# Altium PCB PCB2.PcbDoc
Units mm, origin at the board's own origin, x right, y up, seen from the top; angles counter-clockwise.
Board outline 226.31 x 158.75 mm, 2 copper layers (Top Layer, Bottom Layer); 50 components, 70 nets, 346 pads, 78 vias.
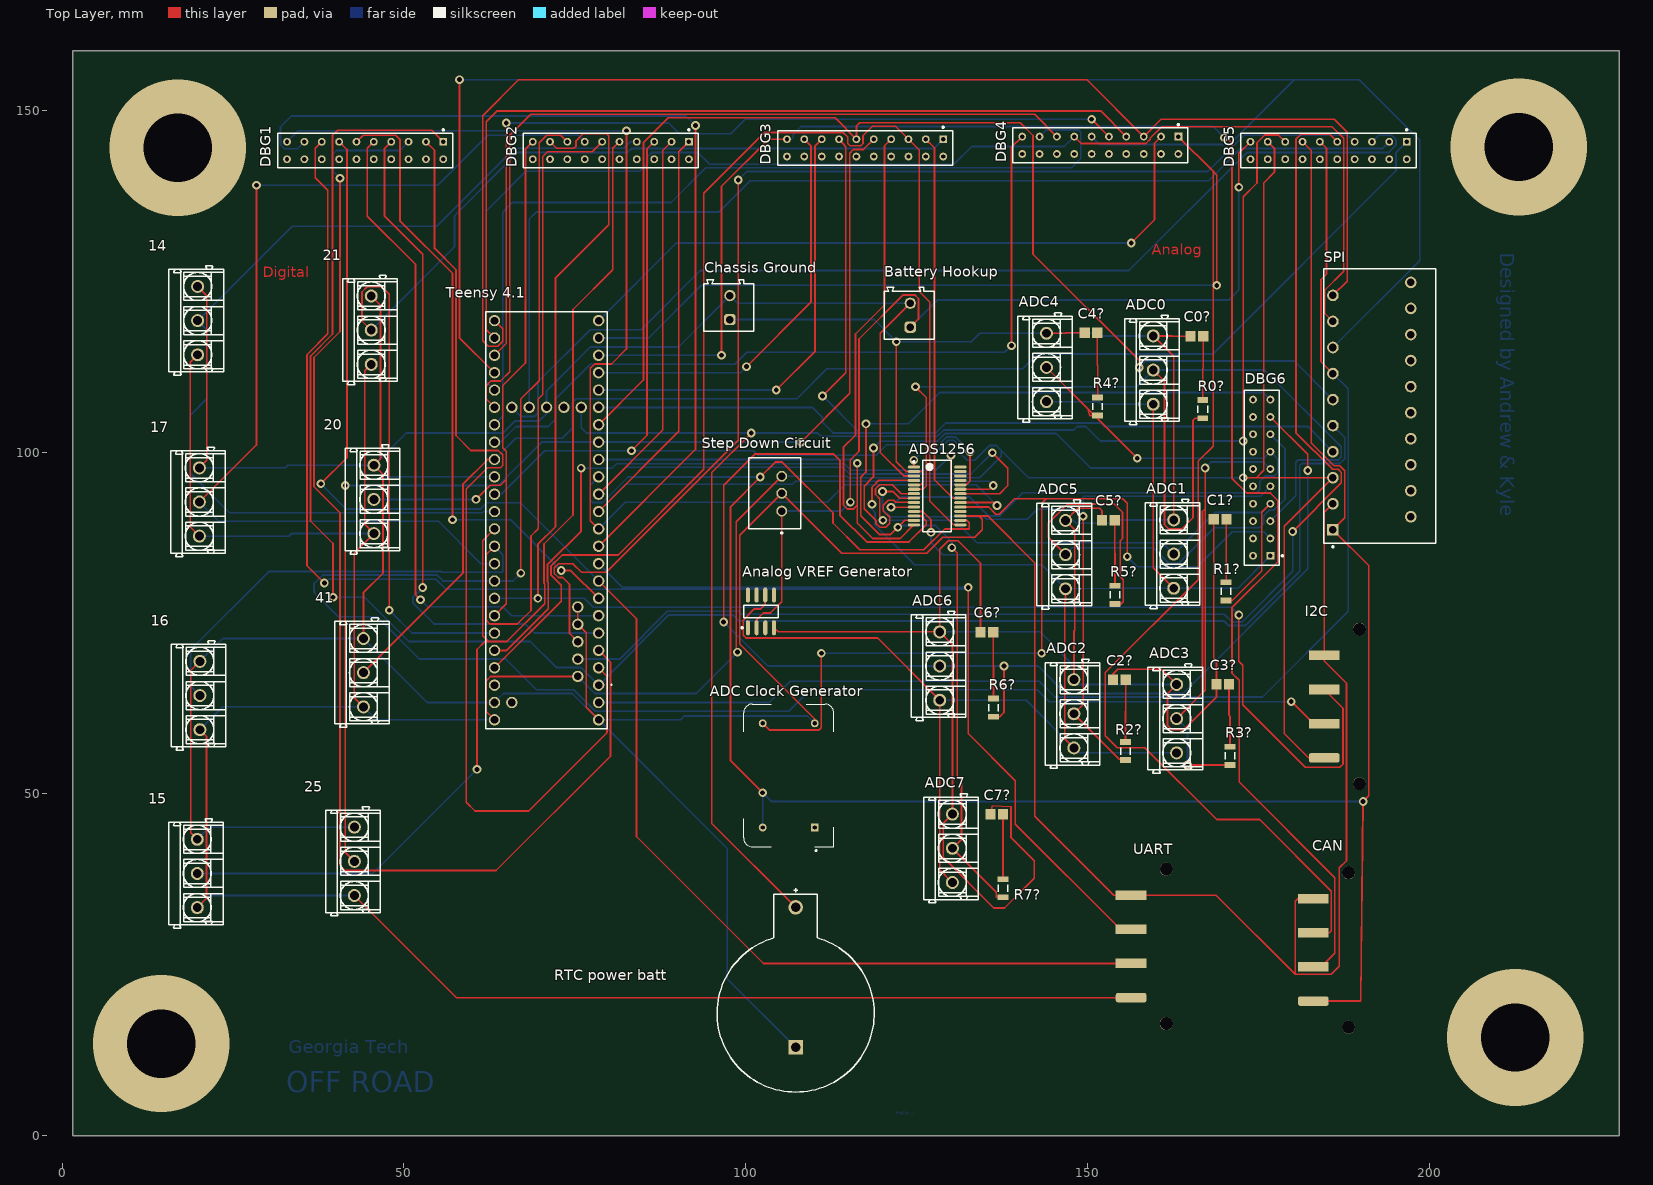
[diagram p0: Top Layer view]
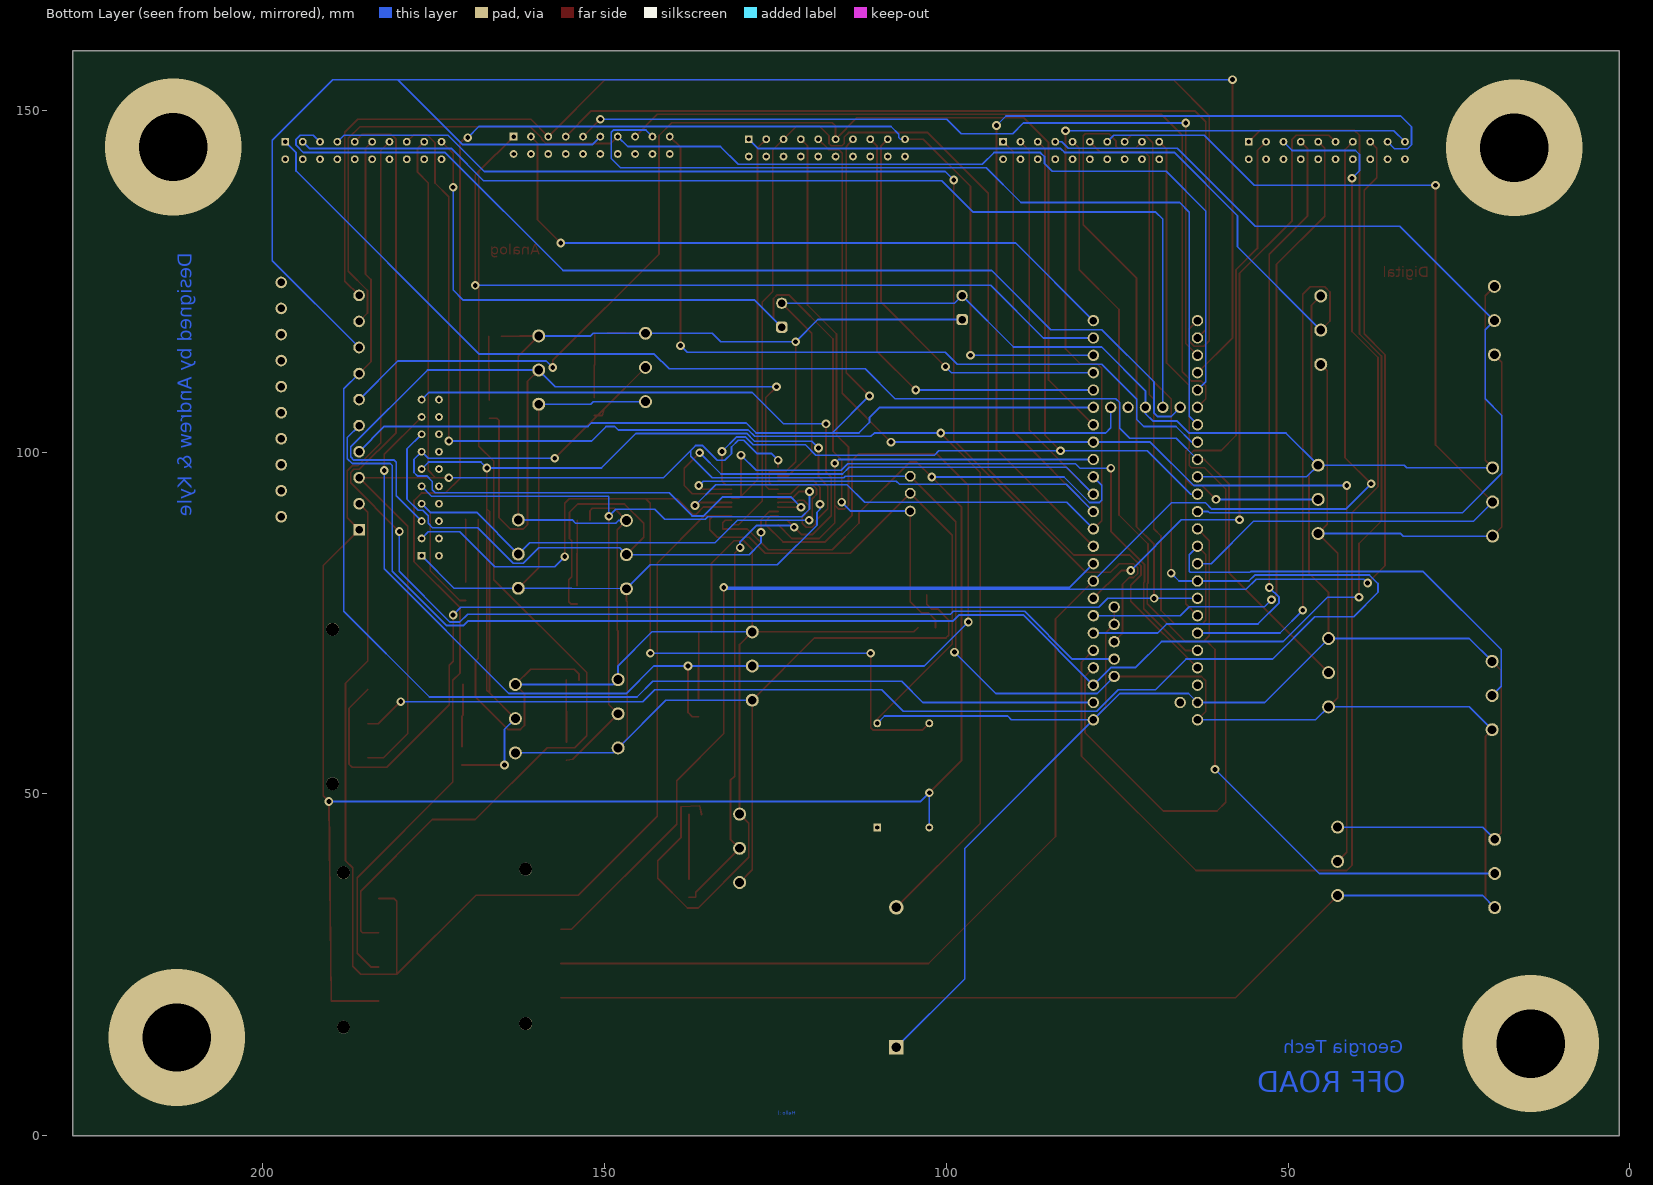
[diagram p1: Bottom Layer view, seen from below]
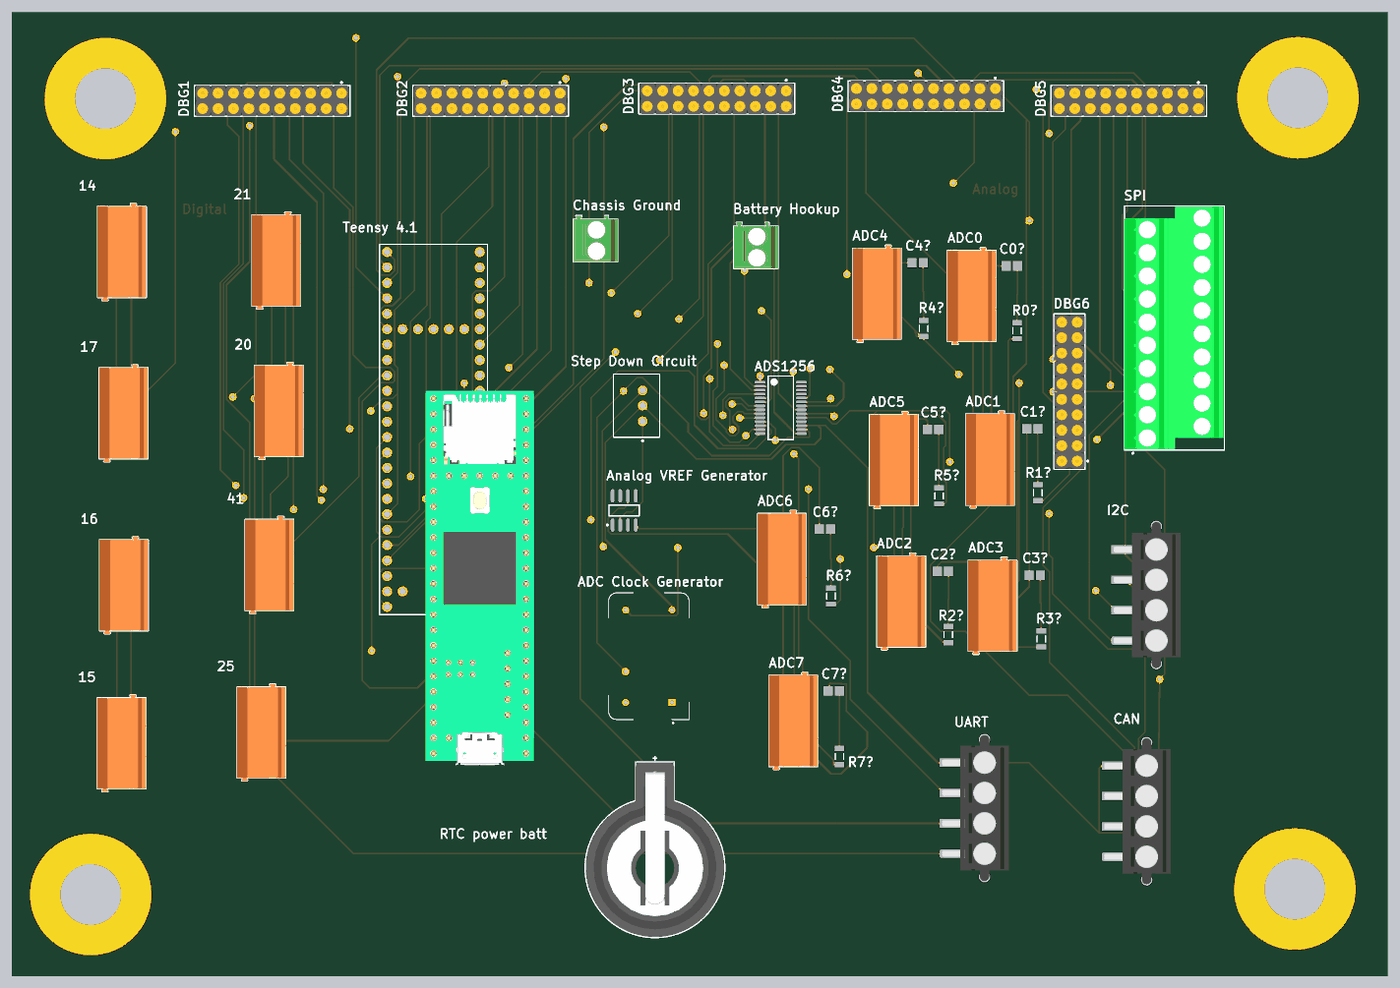
[diagram p2: 3D render of the assembled board from above, using the file's embedded part models]

## Layer stack, top to bottom
Top Solder: solder mask 0.0102, Solder Resist, Dk 3.5
Top Layer: signal copper 0.0356
Dielectric 1: dielectric 0.32, FR-4, Dk 4.8
Bottom Layer: signal copper 0.0356
Bottom Solder: solder mask 0.0102, Solder Resist, Dk 3.5

## Board outline
1.524,0 227.838,0 227.838,158.75 1.524,158.75

## Design rules (kind name [scope] priority, off if disabled: settings)
Clearance [All] p1: gap=0.254 ignorepadtopadclearanceinfootprint=FALSE
PolygonConnect [All] p1: connectstyle=Relief reliefconductorwidth=0.254 reliefentries=4 polygonreliefangle="90 Angle" airgapwidth=0.254
RoutingVias [All] p1: holewidth=0.711 width=1.27 viastyle="Through Hole" minholewidth=0.711 minwidth=1.27 maxholewidth=0.711 maxwidth=1.27
SolderMaskExpansion [All] p1: expansion=0.102 istentingtop=FALSE
SupplyNets "Schematic Supply Nets" [InNet('GND')] p1: voltage=0.000
Width [All] p1: maxlimit=0.254 minlimit=0.254 preferedwidth=0.254
30 further rules are at their usual default settings.

## Classes and differential pairs
component class Sheet1: C0? C1? C2? C3? C4? C5? C6? C7? R0? R1? R2? R3? R4? R5? R6? R7?
component class DebugOutputs: DBG1 DBG2 DBG3 DBG4 DBG5 DBG6
component class MainSchematic: 14 15 16 17 20 21 25 41 ADC0 ADC1 ADC2 ADC3 ADC4 ADC5 ADC6 ADC7 "ADC Clock Generator" ADS1256 "Analog VREF Generator" "Battery Hookup" CAN "Chassis Ground" I2C "RTC power batt" SPI "Step Down Circuit" "Teensy 4.1" UART

## Components (designator, comment, footprint, x,y, rotation, side; value= is the part's Value field where it differs from the comment)
14 "1791620000" PM_5_00_90_03 19.612,119.253 r90 top
15 "1791620000" PM_5_00_90_03 19.558,38.354 r90 top
16 "1791620000" PM_5_00_90_03 19.939,64.389 r90 top
17 "1791620000" PM_5_00_90_03 19.866,92.71 r90 top
20 "1791620000" PM_5_00_90_03 45.393,93.091 r90 top
21 "1791620000" PM_5_00_90_03 45.012,117.856 r90 top
25 "1791620000" PM_5_00_90_03 42.545,40.132 r90 top
41 "1791620000" PM_5_00_90_03 43.869,67.738 r90 top
ADC0 "1791620000" PM_5_00_90_03 159.439,112.014 r90 top
ADC1 "1791620000" PM_5_00_90_03 162.433,85.09 r90 top
ADC2 "1791620000" PM_5_00_90_03 147.828,61.722 r90 top
ADC3 "1791620000" PM_5_00_90_03 162.868,61.007 r90 top
ADC4 "1791620000" PM_5_00_90_03 143.818,112.395 r90 top
ADC5 "1791620000" PM_5_00_90_03 146.612,85.01 r90 top
ADC6 "1791620000" PM_5_00_90_03 128.197,68.707 r90 top
ADC7 "1791620000" PM_5_00_90_03 130.048,42.037 r90 top
"ADC Clock Generator" "MCO-1510A" OSC_ECS-100AX-500 106.299,52.705 r90 top
ADS1256 "ADS1256IDBTG4" TI-DB28_L 128.016,93.599 r0 top
"Analog VREF Generator" "ADR4550ARZ" ADI-R-8_N 102.235,76.708 r90 top
"Battery Hookup" "691214110002S" 691214110002S 123.929,120.043 r90 top
C0? "VJ0805Y682KXAMT" CAPC2013X145X48ML20T23 166.025,116.967 r0 top
C1? "VJ0805Y682KXAMT" CAPC2013X145X48ML20T23 169.418,90.17 r0 top
C2? "VJ0805Y682KXAMT" CAPC2013X145X48ML20T23 154.686,66.675 r0 top
C3? "VJ0805Y682KXAMT" CAPC2013X145X48ML20T23 169.805,66.032 r0 top
C4? "VJ0805Y682KXAMT" CAPC2013X145X48ML20T23 150.531,117.475 r0 top
C5? "VJ0805Y682KXAMT" CAPC2013X145X48ML20T23 153.071,90.043 r0 top
C6? "VJ0805Y682KXAMT" CAPC2013X145X48ML20T23 135.291,73.66 r0 top
C7? "VJ0805Y682KXAMT" CAPC2013X145X48ML20T23 136.743,46.99 r0 top
CAN "691709710304" 691709710304 188.214,27.178 r90 top
"Chassis Ground" "691214110002S" 691214110002S 97.536,121.158 r90 top
DBG1 "TD-110-G-AA" FP-TD-110-G-AA-MFG 44.323,144.145 r180 top
DBG2 "TD-110-G-AA" FP-TD-110-G-AA-MFG 80.264,144.145 r180 top
DBG3 "TD-110-G-AA" FP-TD-110-G-AA-MFG 117.475,144.526 r180 top
DBG4 "TD-110-G-AA" FP-TD-110-G-AA-MFG 151.892,144.907 r180 top
DBG5 "TD-110-G-AA" FP-TD-110-G-AA-MFG 185.293,144.145 r180 top
DBG6 "TD-110-G-AA" FP-TD-110-G-AA-MFG 175.514,96.266 r90 top
I2C "691709710304" 691709710304 189.808,62.778 r90 top
R0? "RC1206FR-10750RL" RESC3116X65X40LL10T20 166.878,106.299 r90 top
R1? "RC1206FR-10750RL" RESC3116X65X40LL10T20 170.307,79.629 r90 top
R2? "RC1206FR-10750RL" RESC3116X65X40LL10T20 155.575,56.261 r90 top
R3? "RC1206FR-10750RL" RESC3116X65X40LL10T20 170.881,55.56 r90 top
R4? "RC1206FR-10750RL" RESC3116X65X40LL10T20 151.511,106.68 r90 top
R5? "RC1206FR-10750RL" RESC3116X65X40LL10T20 154.051,79.121 r90 top
R6? "RC1206FR-10750RL" RESC3116X65X40LL10T20 136.271,62.611 r90 top
R7? "RC1206FR-10750RL" RESC3116X65X40LL10T20 137.668,36.195 r90 top
"RTC power batt" "101" FP-101-MFG 107.315,20.828 r90 top
SPI "1708110" FP-1708110-MFG 192.778,106.746 r90 top
"Step Down Circuit" "OKI-78SR-5/1.5-W36-C" MURA-OKI-78SR-3 105.283,93.98 r90 top
"Teensy 4.1" "TEENSY_4.1" TEENSY41 78.486,65.913 r90 top
UART "691709710304" 691709710304 161.544,27.686 r90 top

## Footprints (in the part's own frame and the unit in brackets; to place one, negate y for a bottom-side part, rotate by r counter-clockwise, add the part's x,y. Pads: shape width x height; smd on the part's side, far side on the other; paste and mask are expansions set on the pad)
691214110002S [mm] "Serie 2141S - 3.50 mm _ 2 pins"
  rrect50% 1.65x1.65 hole 1.1: 1(-1.75,-0.15)
  round 1.65 hole 1.1: 2(1.75,-0.15)
  silkscreen extent -3.5,-3.65 4.1,3.65, body extent -3.5,-3.65 4.1,3.65, height 9.15
691709710304 [mm] "Horizontal Entry SMT with Pressure Clamp, pitch 5mm, 04p"
  rrect50% 1.4x4.5 smd: 1(-7.5,5.15)
  rect 1.4x4.5 smd: 2(-2.5,5.15) 3(2.5,5.15) 4(7.5,5.15)
  round 1.9 hole 1.9 unplated: M1(-11.3,0) M2(11.3,0)
  body extent -12,-4 12,7, height 9.95
ADI-R-8_N [mm] "SOIC, 8-Leads, Body 4.9x3.9mm, Pitch 1.27mm, IPC Medium Density"
  oval 2.2x0.6 smd: 1(-2.4,1.905) 2(-2.4,0.635) 3(-2.4,-0.635) 4(-2.4,-1.905) 5(2.4,-1.905) 6(2.4,-0.635) 7(2.4,0.635) 8(2.4,1.905)
  silkscreen extent -2.52,-2.5 0.9,2.88, body extent -2,-2.5 2,2.5, height 1.75
CAPC2013X145X48ML20T23 [mm] "Chip Capacitor, 2-Leads, Body 2.00x1.25mm, IPC Low Density"
  rect 1.5x1.55 smd: 1(-0.925,0) 2(0.925,0)
  body extent -1.1,-0.72 1.1,0.72, height 1.45
FP-101-MFG [mm]
  rect 2.145x2.145 hole 1.395 paste-2539.97 mask+0: 1(-7.925,0)
  round 2.145 hole 1.395 paste-2539.97 mask+0: 2(12.565,0)
  silkscreen extent -14.46,-11.5 15.38,11.5, body extent -14.57,-11.61 14.57,11.61, height 0.25
FP-1708110-MFG [mm]
  rect 1.7x1.7 hole 1.1 paste-2539.97 mask+0: 1(-18.1,6.85)
  round 1.7 hole 1.1 paste-2539.97 mask+0: 2(-14.29,6.85) 3(-10.48,6.85) 4(-6.67,6.85) 5(-2.86,6.85) 6(0.95,6.85) 7(4.76,6.85) 8(8.57,6.85) 9(12.38,6.85) 10(16.19,6.85) 11(-16.2,-4.55) 12(-12.39,-4.55) 13(-8.58,-4.55) 14(-4.77,-4.55) 15(-0.96,-4.55) 16(2.85,-4.55) 17(6.66,-4.55) 18(10.47,-4.55) 19(14.28,-4.55) 20(18.09,-4.55)
  silkscreen extent -20.72,-8.23 20.1,8.23, body extent -20.2,-8.32 20.2,8.32, height 0.25
FP-TD-110-G-AA-MFG [mm]
  rect 1.135x1.135 hole 0.635 paste-2539.97 mask+0: 1(-11.43,-1.27)
  round 1.135 hole 0.635 paste-2539.97 mask+0: 2(-11.43,1.27) 3(-8.89,-1.27) 4(-8.89,1.27) 5(-6.35,-1.27) 6(-6.35,1.27) 7(-3.81,-1.27) 8(-3.81,1.27) 9(-1.27,-1.27) 10(-1.27,1.27) 11(1.27,-1.27) 12(1.27,1.27) 13(3.81,-1.27) 14(3.81,1.27) 15(6.35,-1.27) 16(6.35,1.27) 17(8.89,-1.27) 18(8.89,1.27) 19(11.43,-1.27) 20(11.43,1.27)
  silkscreen extent -12.81,-3.14 12.81,2.54, body extent -12.91,-2.64 12.91,2.64, height 0.25
MURA-OKI-78SR-3 [mm] "THMT, 3-Leads, Body 10.4x7.6mm"
  round 1.6 hole 1.1: 1(-2.6,0) 2(0,0) 3(2.5,0)
  silkscreen extent -5.92,-2.8 5.2,4.8, body extent -5.2,-2.8 5.2,4.8, height 16.5
OSC_ECS-100AX-500 [mm]
  rect 1.158x1.158 hole 0.65: 1(-7.62,-3.81)
  round 1.158 hole 0.65: 7(7.62,-3.81) 8(7.62,3.81) 14(-7.62,3.81)
  silkscreen extent -11.1,-6.6 10.43,6.6
PM_5_00_90_03 [mm] "PM 5.00/03/90 3.5"
  round 1.9 hole 1.3: A1(-5,-0.2) A2(0,-0.2) A3(5,-0.2)
  silkscreen extent -8,-4 8,4, body extent -8,-4 8,4, height 10.01
RESC3116X65X40LL10T20 [mm] "Chip Resistor, 2-Leads, Body 3.10x1.60mm, IPC High Density"
  rect 0.85x1.6 smd: 1(-1.325,0) 2(1.325,0)
  silkscreen extent -0.5,-0.7 0.5,0.7, body extent -1.6,-0.85 1.6,0.85, height 0.65
TEENSY41 [mm]
  round 1.665 hole 1.11: 1(0,0) 2(2.54,0) 3(5.08,0) 4(7.62,0) 5(10.16,0) 6(12.7,0) 7(15.24,0) 8(17.78,0) 9(20.32,0) 10(22.86,0) 11(25.4,0) 12(27.94,0) 13(27.94,15.24) 14(25.4,15.24) 15(22.86,15.24) 16(20.32,15.24) 17(17.78,15.24) 18(15.24,15.24) 19(12.7,15.24) 20(10.16,15.24) 21(7.62,15.24) 22(5.08,15.24) 23(2.54,15.24) 24(33.02,0) 25(35.56,0) 26(38.1,0) 27(40.64,0) 28(43.18,0) 29(45.72,0) 30(48.26,0) 31(50.8,0) 32(53.34,0) 33(53.34,15.24) 34(50.8,15.24) 35(48.26,15.24) 36(45.72,15.24) 37(43.18,15.24) 38(40.64,15.24) 39(38.1,15.24) 40(35.56,15.24) 41(33.02,15.24) 42(30.48,0) 43(40.64,2.54) 44(40.64,5.08) 45(40.64,7.62) 46(40.64,10.16) 47(40.64,12.7) 48(11.43,3.05) 49(8.89,3.05) 50(6.35,3.05) 51(3.81,3.05) 52(1.27,3.05) 53(0,15.24) 55(-5.08,15.24) 57(-2.54,0) 68(-2.54,12.7) 69(30.48,15.24) 70(-2.54,15.24) 71(-5.08,0)
  silkscreen extent -6.35,-1.95 54.61,16.51, body extent -31.18,-8.89 30.48,8.89, height 7.15
TI-DB28_L [mm] "SOP, 28-Leads, Body 10.2x5.3mm, Pitch 0.65mm, IPC High Density"
  oval 1.8x0.45 smd: 1(-3.4,4.225) 2(-3.4,3.575) 3(-3.4,2.925) 4(-3.4,2.275) 5(-3.4,1.625) 6(-3.4,0.975) 7(-3.4,0.325) 8(-3.4,-0.325) 9(-3.4,-0.975) 10(-3.4,-1.625) 11(-3.4,-2.275) 12(-3.4,-2.925) 13(-3.4,-3.575) 14(-3.4,-4.225) 15(3.4,-4.225) 16(3.4,-3.575) 17(3.4,-2.925) 18(3.4,-2.275) 19(3.4,-1.625) 20(3.4,-0.975) 21(3.4,-0.325) 22(3.4,0.325) 23(3.4,0.975) 24(3.4,1.625) 25(3.4,2.275) 26(3.4,2.925) 27(3.4,3.575) 28(3.4,4.225)
  silkscreen extent -3.52,-5.25 2.1,5.25, body extent -2.8,-5.25 2.8,5.25, height 2

## Part data
14 15 16 17 20 21 25 41 ADC0 ADC1 ADC2 ADC3 ADC4 ADC5 ADC6 ADC7: library part CMP-1559-01624-1, "OMNIMATE Signal - series PM", Colour=Orange, Manufacturer=Weidmueller, Rated_current_use_group_B_UL_1059="15 A", Rated_voltage_for_surge_voltage_class_pollution_degree_II_2="600 V", Rated_voltage_use_group_B_UL_1059="300 V", UL_94_flammability_rating=V-0, ComponentLink1Description="Manufacturer URL", ComponentLink1URL=http://www.weidmueller.com/, ComponentLink2Description="URL Link1", ComponentLink2URL=http://catalog.weidmueller.com/catalog/Start.do?localeId=en&ObjectID=1791620000, Contact_material=Cu-Leg, Contact_surface=tinned, Insulating_material="Wemid (PA)", Mounting_onto_the_PCB="Solder connection", No_of_poles=3, PackageReference=PM_5_00_90_03, Packaging=Box, PartNumber=1791620000, Pitch_inch="0,197 inch", Pitch_mm="5 mm", Qty="500 PCS", Revision=V1, Short_text_for_material="PM 5.00/03/90 3.5SN OR BX", Side_termination_characteristic="closed side", Solder_pin_length_mm="3,5 mm", Solid_max_H05_07_V_U="2,5 mm²", Solid_min_H05_07_V_U="0,13 mm²", Wire_cross_section_AWG_max_UL_1059="AWG 14", Wire_cross_section_AWG_min_UL_1059="AWG 26"
"ADC Clock Generator": library part ECS-100AX-500, "Oscillator  14-DIP, 4 Leads (Full Size, Metal Can)", Package=None, Availability=Unavailable, MP=ECS-100AX-500, Price=None
ADS1256: library part CMP-0003-00153-1, "24-Bit, 30 kSPS Very Low Noise Delta-Sigma ADC with Multiplexer, -40 to 85 degC, 28-pin SOP (DB28), Green (RoHS & no Sb/Br)", Analog Voltage AV/DD(Max)(V)=5.25, Analog Voltage AV/DD(Min)(V)=4.75, Manufacturer="Texas Instruments", # Input Channels=8, Architecture=Delta-Sigma, Code_JEDEC=MO-150, ComponentLink1Description="Manufacturer URL", ComponentLink1URL=http://www.ti.com/, ComponentLink2Description=Datasheet, ComponentLink2URL=http://www.ti.com/general/docs/lit/getliterature.tsp?genericPartNumber=ADS1256&fileType=pdf, ComponentLink3Description="Package Specification", ComponentLink3URL=http://www.ti.com/lit/ml/msso002e/msso002e.pdf, DatasheetVersion=SBAS288J, Digital Supply(Max)(V)=3.6, Digital Supply(Min)(V)=1.8, Eco-Plan="Green (RoHS & no Sb/Br)", Interface="Serial SPI", Mounting Technology="Surface Mount", PackageDescription="28-Pin Plastic Small Outline, Body 10.2 X 5.3 mm, Pitch 0.65 mm", PackageReference=DB28, PackageVersion="4040065/E, 12/2001", PartNumber=ADS1256IDBTG4, Resolution(Bits)=24, Sample Rate (max)(SPS)=30k, SubFamily="Precision ADC (<=10MSPS)"
"Analog VREF Generator": library part CMP-0784-00194-1, "Ultralow Noise, High Accuracy Voltage Reference, 5 V Output, 3 to 15 V Supply, Industrial, 8-pin SOIC (R-8), Tube", Manufacturer="Analog Devices", Operating Temp Range="-40 to 125 degC", Code_JEDEC=MS-012-AA, ComponentLink1Description="Manufacturer URL", ComponentLink1URL=http://www.analog.com/en/index.html, ComponentLink2Description=Datasheet, ComponentLink2URL=http://www.analog.com/static/imported-files/data_sheets/ADR4520_4525_4530_4533_4540_4550.pdf, ComponentLink3Description="Package Specification", ComponentLink3URL=http://www.analog.com/static/imported-files/packages/PKG_PDF/SOIC_Narrow%20(R)/R_8.pdf, ComponentLink4Description="URL Link1", ComponentLink4URL="Product URL:http://www.analog.com/en/special-linear-functions/voltage-references/adr4550/products/product.html", DatasheetVersion="Rev. 0", Max V Supply (V)=15, Min V Supply (V)=3, Mounting Technology="Surface Mount", PackageDescription="8-Pin Standard Small Outline Package, Body 4.9 x 3.9 mm, Pitch 1.27 mm", PackageReference=R-8, PackageVersion="060506-A, 06/2006", Packing=Tube, PartNumber=ADR4550ARZ, Ref Out TC (ppm/C)=4, Vout=5V
"Battery Hookup" "Chassis Ground": library part CMP-1502-02465-2, Current Rating=10A, Max Operating Temperature=120°C, Min Operating Temperature=-30°C, Voltage Rating=300V, Contact Material="Nickel, Tin", Height=9.2mm, Lead Pitch=3.5mm, NexarPartId=94172715, Number of Contacts=2, Number of Pins=2, Number of Rows=1, Packaging=Box
C0? C1? C2? C3? C4? C5? C6? C7?: library part CMP-2007-03205-1, Manufacturer=Vitramon, Part Number=VJ0805Y682KXAMT
CAN I2C UART: library part CMP-1502-03337-2, Color=Black, Current=6A, Flammability Rating="UL94 V-0", Max Operating Temperature=130°C, Min Operating Temperature=-40°C, Voltage=300V, Connector Type=Screw, Contact Material=Nickel, Contact Plating=Tin, Current Rating=6A, Height=10.2mm, Housing Material=Nylon, Lead Pitch=5mm, Length=20mm, Mount="Surface Mount", NexarPartId=34171771, Number of Contacts=4, Number of Levels=1, Number of Pins=4, Number of Positions=4, Number of Positions Per Level=4, Number of Rows=1, Packaging=Digi-Reel®, Pitch=5mm, Plating=Steel, REACH SVHC=Unknown, RoHS=Compliant, Termination=Screw, Voltage Rating=300V, Wire Gauge (Max)=30AWG, Wire Gauge (Min)=30AWG, Wire/Cable Gauge=30AWG
DBG1 DBG2 DBG3 DBG4 DBG5 DBG6: library part CMP-02766-001426-1, ".100\" DOUBLE ROW SCREW MACHINE T", Contact Material=Brass, Contact Plating=Gold, Gender=Male, Mount="Through Hole", Number of Contacts=20, Number of Rows=2, REACH SVHC="No SVHC", series=TD, Termination="Through Hole"
R0? R1? R2? R3? R4? R5? R6? R7?: library part CMP-2003-04964-1, Manufacturer=Yageo, Part Number=RC1206FR-10750RL
"RTC power batt": library part CMP-19636-000018-1, "BATTERY HOLDER COIN 20MM PC PIN", Max Operating Temperature=145°C, Min Operating Temperature=-50°C, Package Quantity=1, Body Material=PBT, Contact Plating=Tin, Lead Free="Lead Free", Material=Steel, Mount="Through Hole", Number of Batteries=1, Number of Cells=1, Packaging=Bag, REACH SVHC="No SVHC", series=-, Termination="PC Pin"
SPI: library part CMP-00298-00058710-1, "1708110 10 Position Wire to Board Terminal Block Horizontal with Board 0.150\" (3.81mm) Through Hole", Ambient Temperature Range High=105°C, Color=Green, Current=10A, Current Rating=8A, Flammability Rating="UL94 V-0", Min Operating Temperature=-40°C, Voltage=300V, Voltage Rating=200V, Approvals="CB, CSA, UL, cULus", Connector Type=Screw, Contact Material=Tin, Depth=16.2mm, Gender=Male, Height=16.2mm, Housing Color=Green, Housing Material=Nylon, Insulation Material=Nylon, Lead Free="Lead Free", Length=38.1mm, Material=Polyamide, Max Current Rating=10A, Max Operating Temperature=105°C, Mount="Through Hole", NexarPartId=58710, Number of Circuits=20, Number of Contacts=10, Number of Levels=2, Number of Pins=20, Number of Poles=10, Number of Positions=10, Number of Positions Per Level=10, Number of Rows=2, Orientation=Straight, Pitch=3.81mm, RoHS=Compliant, Stripping Length=5mm, Termination=Screw, Weight=1.360777kg, Width=16.3mm, Wire Gauge (Max)=30AWG, Wire Gauge (Min)=26AWG
"Step Down Circuit": library part CMP-2000-05274-1, "Non-Isolated DC/DC Converter, 7.5 W, 7 to 36 V, 1.5 A, -40 to 85 degC, 3-Pin THD, RoHS", Current - Output (Max)=1.5A, Manufacturer=Murata, Operating Temperature=-40degC~85degC, Package / Case=3-SIPModule, Power (Watts) - Manufacture Series=8W, Voltage - Input (Max)=36V, Voltage - Input (Min)=7V, Voltage - Isolation=-, Voltage - Output 1=5V, Applications=ITE(Commercial), Category=PowerSupplies-BoardMount, Datasheet URL=https://datasheet.ciiva.com/8006/1790439-8006672.pdf, Datasheet Version=Oct-13, Efficiency=90.5%, Family=DCDCConverters, Features=SCP, Manufacturer URL=http://www.murata.com/, Mounting Type=ThroughHole, Number of Outputs=1, Packaging=Tube, Power (Watts) - Max=8W, series=Okami™OKI-78SR, Size / Dimension="0.41\"Lx0.30\"Wx0.65\"H(10.4mmx7.6mmx16.5mm)", Type=LinearRegulatorReplacement, Voltage - Output 2=-, Voltage - Output 3=-
"Teensy 4.1": "<b>Teensy 4.1 Development Board</b><p> Source: <a href=\"https://www.pjrc.com/store/teensy41.html\"> Datasheet </a>", Package=None, Check_prices=https://www.snapeda.com/parts/Teensy%204.1/PJRC/view-part/?ref=eda, MF=PJRC, MP="Teensy 4.1", SnapEDA_Link=https://www.snapeda.com/parts/Teensy%204.1/PJRC/view-part/?ref=snap

## Via types
v1: diameter 1.27, hole 0.711, Top Layer to Bottom Layer, 74 vias
v2: diameter 20, hole 10, Top Layer to Bottom Layer, 4 vias

## Nets (pads, with @x,y where several pads share a name; then routed paths per layer and width w, separated by ;. In a path a pad name is that pad's centre, name@x,y a point inside that pad or via, vN(x,y) a via of type N, cw(c..) or ccw(c..) an arc to the next point about the centre after c; other vN are vias at no path point)
GND: 14.A3 15.A3 16.A3 17.A3 20.A3 21.A3 25.A3 41.A3 "ADC Clock Generator.7" "Battery Hookup.2" "Chassis Ground.2" "RTC power batt.1" "Step Down Circuit.2" "Teensy 4.1.45" "Teensy 4.1.48" "Teensy 4.1.49" "Teensy 4.1.69" "Teensy 4.1.70" "Teensy 4.1.71" ADS1256.3 ADS1256.17 CAN.4 I2C.4 SPI.2 UART.4 | length 738.3
  Top Layer w0.254: 15.A3 18.796,44.316 18.796,68.046 16.A3 ; 14.A3 21.158,122.907 21.158,98.802 17.A3 ; 41.A3 44.069,79.426 46.939,82.296 46.939,96.745 20.A3 46.558,99.056 46.558,121.51 21.A3 ; 75.436,77.343 75.436,74.803 76.657,73.582 76.657,62.662 78.486,60.833 ; 110.109,60.325 110.109,60.96 99.141,71.928 99.141,87.838 105.283,93.98 114.046,85.217 126.522,85.217 128.855,87.55 133.539,87.55 134.62,88.631 134.62,90.185 134.131,90.674 ; 124.079,121.793 119.71,117.424 119.71,99.96 123.146,96.524 ADS1256.3 ; ADS1256.17 134.131,90.674 ; CAN.4 180.804,34.678 180.416,34.29 180.416,23.597 ; SPI.2 184.658,91.186 I2C.4 184.658,69.444 187.909,66.192 187.909,40.234 186.868,39.192 186.868,24.765 185.699,23.597 180.416,23.597 ; 134.131,90.674 135.397,90.674 142.291,83.78 142.291,46.743 153.848,35.186 UART.4 168.827,35.186 180.416,23.597
  Bottom Layer w0.254: 15.A3 21.536,45.132 25.A3 ; 17.A3 32.639,97.71 33.02,98.091 20.A3 ; 16.A3 23.488,72.738 41.A3 53.434,63.373 63.246,63.373 64.567,64.694 74.625,64.694 78.486,60.833 ; 63.246,96.393 47.291,96.393 20.A3 ; 107.315,12.903 97.307,22.911 97.307,42.012 78.486,60.833 ; 110.109,60.325 109.042,61.392 91.034,61.392 90.475,60.833 78.486,60.833 ; 124.079,121.793 98.801,121.793 97.686,122.908 90.17,115.392 77.267,115.392 70.866,108.991 70.866,106.553 70.866,105.664 69.748,104.546 66.218,104.546 64.465,102.794 50.296,102.794 20.A3
Net14_A1: 14.A1 15.A1 16.A1 17.A1 20.A1 21.A1 25.A1 41.A1 "Step Down Circuit.3" "Teensy 4.1.52" "Teensy 4.1.55" ADS1256.1 DBG5.17 I2C.1 SPI.3 UART.1 | length 598.1
  Top Layer w0.254: 15.A1 21.107,34.703 21.107,58.421 16.A1 ; 14.A1 18.72,113.161 18.72,89.056 17.A1 ; 25.A1 57.691,20.186 UART.1 ; 41.A1 42.723,64.084 42.723,85.221 20.A1 44.247,89.437 44.247,111.891 21.A1 ; 63.246,60.833 62.027,62.052 62.027,66.548 62.662,67.183 75.436,67.183 ; v1(98.806,70.739) 98.633,70.912 98.633,89.83 105.283,96.48 ; ADS1256.1 v1(124.616,98.831) ; v1(172.796,96.266) 174.752,96.266 ; DBG5.17 177.368,144.45 177.368,140.945 175.819,139.395 175.819,97.333 174.752,96.266 ; I2C.1 182.364,55.278 178.816,58.826 178.816,89.154 SPI.3 174.752,96.266
  Bottom Layer w0.254: 15.A1 21.536,35.132 25.A1 ; 17.A1 33.147,87.71 33.528,88.091 20.A1 ; 16.A1 23.488,62.738 41.A1 45.974,60.833 63.246,60.833 ; 75.436,67.183 77.925,64.694 92.761,64.694 v1(98.806,70.739) ; 105.283,96.48 114.779,96.48 114.993,96.266 134.279,96.266 137.414,99.401 137.414,100.243 ; v1(124.616,98.831) 125.607,99.822 127.722,99.822 129.627,101.727 130.469,101.727 131.432,100.764 131.432,99.795 132.396,98.831 133.539,98.831 135.669,100.961 136.695,100.961 137.414,100.243 ; v1(172.796,96.266) 141.391,96.266 137.414,100.243
Net14_A2: 14.A2 "Teensy 4.1.14" DBG2.7 | length 146
  Bottom Layer w0.254: 63.246,91.313 61.661,91.313 61.49,91.142 24.478,91.142 18.72,96.901 18.72,105.359 21.158,107.798 21.158,117.907 14.A2 33.63,133.071 54.788,133.071 66.184,144.466 82.16,144.466 83.109,145.415 DBG2.7
Net15_A2: 15.A2 "Teensy 4.1.15" DBG2.9 | length 167.2
  Top Layer w0.254: v1(60.681,53.594) 60.681,71.12 61.874,72.314 62.357,72.314 ; 63.246,88.773 61.519,87.046 61.519,73.152 62.357,72.314 ; DBG2.9 80.569,144.45 80.569,126.721 74.727,120.879 74.727,90.805 70.485,86.563 70.485,80.852 70.612,80.725 70.612,77.847 65.078,72.314 62.357,72.314
  Bottom Layer w0.254: 15.A2 45.441,38.354 v1(60.681,53.594)
Net16_A2: 16.A2 "Teensy 4.1.16" DBG2.11 | length 157.6
  Top Layer w0.254: 63.246,86.233 62.032,85.019 62.032,75.382 62.56,74.854 66.596,74.854 68.58,76.838 68.58,87.741 69.647,88.808 69.647,107.772 70.307,108.433 70.307,143.256 71.01,143.958 77.537,143.958 DBG2.11
  Bottom Layer w0.254: 16.A2 18.796,65.732 18.796,71.12 30.201,82.525 55.469,82.525 55.571,82.423 64.313,82.423 64.465,82.575 64.465,85.014 63.246,86.233
Net17_A2: 17.A2 "Teensy 4.1.17" DBG2.13 | length 148.2
  Top Layer w0.254: 17.A2 28.423,101.067 v1(28.423,139.065)
  Bottom Layer w0.254: 17.A2 22.87,89.906 55.05,89.906 61.263,83.693 63.246,83.693 ; v1(28.423,139.065) 54.94,139.065 62.255,146.38 75.489,146.38 DBG2.13
Net20_A2: 20.A2 "Teensy 4.1.20" DBG2.19 | length 92.7
  Top Layer w0.254: v1(60.554,93.091) 62.636,95.174 64.135,95.174 64.968,96.006 ; 63.246,76.073 64.968,77.795 64.968,96.006 ; DBG2.19 67.767,144.348 67.767,113.055 64.465,109.753 64.465,100.655 64.968,100.152 64.968,96.006
  Bottom Layer w0.254: 20.A2 v1(60.554,93.091)
Net21_A2: 21.A2 "Teensy 4.1.21" DBG3.1 | length 171.8
  Top Layer w0.254: 21.A2 43.866,119.202 43.866,123.444 44.628,124.206 46.736,124.206 47.854,123.088 v1(47.854,76.86)
  Bottom Layer w0.254: 21.A2 57.404,130.048 57.404,134.595 66.675,143.866 82.702,143.866 83.261,144.424 127.533,144.424 DBG3.1 ; v1(47.854,76.86) 51.181,73.533 63.246,73.533
Net25_A2: 25.A2 "Teensy 4.1.25" DBG3.9 | length 174.5
  Top Layer w0.254: v1(41.402,95.123) 41.402,41.475 25.A2 ; v1(108.102,101.473) 115.24,108.61 115.24,143.764 115.775,144.299 117.248,144.299 DBG3.9
  Bottom Layer w0.254: v1(41.402,95.123) 63.805,95.123 70.155,101.473 78.486,101.473 v1(108.102,101.473)
Net41_A2: 41.A2 "Teensy 4.1.41" DBG5.1 | length 196.2
  Top Layer w0.254: 41.A2 58.623,82.292 58.623,95.317 62.239,98.933 63.246,98.933
  Bottom Layer w0.254: 63.246,98.933 66.337,102.024 73.152,102.024 74.625,103.497 74.625,107.264 75.184,107.823 107.518,107.823 111.887,112.192 140.564,112.192 142.723,114.351 168.351,114.351 195.148,141.148 195.148,143.84 DBG5.1
NetADC0_A1: "Analog VREF Generator.6" ADC0.A1 ADC1.A1 ADC2.A1 ADC3.A1 ADC4.A1 ADC5.A1 ADC6.A1 ADC7.A1 ADS1256.4 DBG6.1 | length 249.6
  Top Layer w0.254: 102.87,79.108 102.87,77.724 102.21,77.064 101.275,77.064 99.695,75.484 99.695,75.436 99.649,75.39 99.649,73.226 100.053,72.822 119.282,72.822 ADC6.A1 128.397,38.888 ADC7.A1 ; v1(118.491,92.37) 118.491,94.865 119.5,95.874 ADS1256.4 ; ADC5.A1 146.812,78.257 146.685,78.13 146.685,58.065 ADC2.A1 ; ADC0.A1 159.639,83.084 ADC1.A1
  Bottom Layer w0.254: v1(118.491,92.37) 118.491,91.66 118.931,91.22 118.931,89.298 124.714,83.515 143.307,83.515 ADC5.A1 154.791,80.09 ADC1.A1 172.038,80.09 DBG6.1 ; ADC6.A1 141.043,63.707 ADC2.A1 148.743,56.007 ADC3.A1 ; ADC4.A1 151.638,107.395 152.019,107.014 ADC0.A1
NetADC0_A2: ADC0.A2 ADS1256.6 DBG6.5 R0?.1 | length 148
  Top Layer w0.254: ADS1256.6 125.943,94.574 126.416,95.047 126.416,108.001 v1(124.841,109.576) ; ADC0.A2 161.29,110.363 161.29,89.408 161.95,88.748 163.779,88.748 165.456,90.424 165.456,104.648 165.782,104.974 R0?.1
  Bottom Layer w0.254: v1(124.841,109.576) 157.201,109.576 ADC0.A2 175.92,112.014 187.159,100.775 187.159,99.314 186.69,98.845 180.789,98.845 180.496,98.552 180.496,93.628 DBG6.5
NetADC0_A3: "Analog VREF Generator.4" "Chassis Ground.1" ADC0.A3 ADC1.A3 ADC2.A3 ADC3.A3 ADC4.A3 ADC5.A3 ADC6.A3 ADC7.A3 ADS1256.2 ADS1256.5 C0?.1 C1?.1 C2?.1 C3?.1 C4?.1 C5?.1 C6?.1 C7?.1 | length 391.5
  Top Layer w0.254: 104.14,74.308 104.741,73.707 ADC6.A3 ; v1(122.047,116.154) 122.047,98.603 123.476,97.174 ADS1256.2 125.908,97.174 125.908,95.504 125.628,95.224 ADS1256.5 ; C6?.1 134.366,83.74 131.064,87.042 129.667,87.042 128.397,85.772 ADC6.A3 ; C7?.1 136.072,48.26 138.811,48.133 138.811,43.637 142.24,40.208 142.24,37.668 137.871,33.299 136.322,33.299 128.905,40.716 128.905,45.694 ADC7.A3 130.248,71.856 ADC6.A3 ; ADC4.A3 146.812,117.395 146.892,117.475 C4?.1 ; ADC2.A3 148.028,73.787 148.158,73.917 148.158,88.664 ADC5.A3 148.592,91.79 151.796,91.79 152.146,91.44 C5?.1 ; C2?.1 153.761,67.579 154.432,68.25 160.825,68.25 ADC3.A3 161.722,64.661 161.722,60.02 162.306,59.436 164.186,59.436 168.88,64.13 C3?.1 168.88,69.449 168.493,69.835 C1?.1 ; ADC1.A3 162.633,114.02 ADC0.A3 162.331,117.014 162.378,116.967 C0?.1
  Bottom Layer w0.254: 97.686,119.408 118.793,119.408 v1(122.047,116.154) 132.998,116.154 134.239,117.395 ADC4.A3 151.638,117.395 152.019,117.014 ADC0.A3 ; ADC6.A3 143.064,73.707 148.028,68.743 ADC2.A3 148.743,66.007 ADC3.A3 ; ADC5.A3 147.963,90.01 148.361,89.611 154.262,89.611 154.741,90.09 ADC1.A3
NetADC1_A2: ADC1.A2 ADS1256.7 DBG6.7 R1?.1 | length 90.6
  Top Layer w0.254: v1(120.07,90.036) 119.634,90.472 119.634,93.178 118.999,93.813 118.999,94.655 119.594,95.25 121.423,95.25 122.749,93.924 ADS1256.7 ; R1?.1 171.196,78.304 175.514,82.622 175.514,91.186 DBG6.7
  Bottom Layer w0.254: v1(120.07,90.036) 130.563,90.036 133.858,86.741 160.982,86.741 ADC1.A2 168.729,91.186 175.514,91.186 DBG6.7
NetADC2_A2: ADC2.A2 ADS1256.8 DBG6.9 R2?.1 | length 109.3
  Top Layer w0.254: v1(120.015,94.234) 121.609,94.234 122.569,93.274 ADS1256.8 ; v1(149.377,90.627) 149.377,63.071 ADC2.A2 154.686,55.064 R2?.1
  Bottom Layer w0.254: v1(120.015,94.234) 120.015,91.694 121.165,90.544 134.925,90.544 135.299,90.17 141.21,90.17 142.683,91.643 148.361,91.643 v1(149.377,90.627) 149.377,93.539 175.327,93.539 DBG6.9
NetADC3_A2: ADC3.A2 ADS1256.9 DBG6.11 R3?.1 | length 163.7
  Top Layer w0.254: v1(118.694,100.62) 118.694,96.379 117.348,95.033 117.348,91.744 119.054,90.038 119.054,89.615 119.649,89.02 120.491,89.02 121.086,89.615 121.086,90.457 120.142,91.401 120.142,92.242 120.853,92.953 121.694,92.953 121.985,92.661 124.579,92.661 ADS1256.9 ; ADC3.A2 166.854,64.793 ; v1(164.643,54.235) R3?.1 ; v1(167.234,97.688) 167.234,91.693 ; 166.854,64.793 167.234,65.173 167.234,91.693 ; 166.854,64.793 166.854,91.313 167.234,91.693
  Bottom Layer w0.254: v1(118.694,100.62) 119.674,101.6 128.063,101.6 129.206,102.743 145.415,102.743 150.47,97.688 v1(167.234,97.688) 168.097,98.552 175.768,98.552 DBG6.11 ; ADC3.A2 164.643,59.432 v1(164.643,54.235)
NetADC4_A2: ADC4.A2 ADS1256.10 DBG6.13 R4?.1 | length 109.5
  Top Layer w0.254: v1(121.274,91.937) 124.579,91.937 ADS1256.10 ; ADC4.A2 150.05,106.363 ; R4?.1 R4?.1@151.058,105.355 ; v1(157.302,99.111) R4?.1@151.058,105.355 ; 150.05,106.363 R4?.1@151.058,105.355 ; 150.05,106.363 150.359,105.355 R4?.1@151.058,105.355
  Bottom Layer w0.254: v1(121.274,91.937) 122.791,93.454 132.733,93.454 135.51,90.678 137.2,90.678 140.569,94.047 174.769,94.047 175.209,94.488 175.209,95.707 176.03,96.528 177.402,96.528 177.902,97.028 177.902,98.958 DBG6.13 175.819,99.111 v1(157.302,99.111)
NetADC5_A2: ADC5.A2 ADS1256.11 DBG6.15 R5?.1 | length 108
  Top Layer w0.254: ADS1256.11 125.908,91.324 127.127,90.105 v1(127.127,88.265) ; ADC5.A2 144.272,87.55 144.272,89.582 147.108,92.418 153.911,92.418 155.143,91.186 155.143,87.376 154.813,87.046 154.813,81.763 155.245,81.331 155.245,78.101 154.94,77.796 R5?.1
  Bottom Layer w0.254: v1(127.127,88.265) 127.127,86.741 128.858,85.01 ADC5.A2 147.806,86.004 159.639,86.004 161.884,83.759 163.388,83.759 168.58,88.951 175.184,88.951 175.819,89.586 175.819,90.703 176.623,91.507 177.292,91.507 178.918,93.133 178.918,100.482 DBG6.15
NetADC6_A2: ADC6.A2 ADS1256.12 DBG6.17 R6?.1 | length 195.7
  Top Layer w0.254: v1(96.774,75.159) 96.774,95.174 101.321,99.72 112.871,99.72 113.792,98.799 113.792,90.78 117.704,86.868 123.901,86.868 126.441,89.408 126.441,89.916 125.683,90.674 ADS1256.12 ; R6?.1 137.16,61.286 137.795,61.921 v1(137.795,68.707) ; DBG6.17 182.245,99.695 v1(182.245,97.307)
  Bottom Layer w0.254: v1(96.774,75.159) 103.226,68.707 ADC6.A2 v1(137.795,68.707) 142.799,68.707 146.83,64.676 163.99,64.676 182.245,82.931 v1(182.245,97.307)
NetADC7_A2: ADC7.A2 ADS1256.13 DBG6.19 R7?.1 | length 150.9
  Top Layer w0.254: v1(117.602,104.149) 117.602,97.109 116.84,96.347 116.84,90.678 119.554,87.964 121.22,87.964 v1(122.276,89.02) 123.28,90.024 ADS1256.13 ; v1(130.175,86.026) 130.962,85.239 130.962,52.603 131.597,51.968 131.597,43.386 ADC7.A2 136.652,35.633 136.652,34.87 R7?.1
  Bottom Layer w0.254: v1(117.602,104.149) 123.834,104.149 128.422,108.737 175.743,108.737 DBG6.19 ; v1(122.276,89.02) 122.537,89.281 127.762,89.281 130.175,86.868 v1(130.175,86.026)
"NetADC Clock Generator_8": "ADC Clock Generator.8" ADS1256.19 DBG6.3 | length 133
  Top Layer w0.254: 102.489,60.325 103.454,59.36 110.744,59.36 111.074,59.69 v1(111.074,70.587) ; ADS1256.19 135.56,91.974 136.602,90.932 137.11,90.932 139.345,93.167 143.968,93.167 ; v1(143.307,70.587) 143.307,92.506 143.968,93.167 ; v1(155.829,84.709) 155.829,92.536 155.198,93.167 143.968,93.167
  Bottom Layer w0.254: v1(111.074,70.587) v1(143.307,70.587) ; v1(155.829,84.709) 157.302,83.236 166.091,83.236 171.196,88.341 175.819,88.341 DBG6.3
"NetADC Clock Generator_14": "ADC Clock Generator.14" "Teensy 4.1.42" ADS1256.16 CAN.1 DBG5.13 SPI.1 | length 354.1
  Top Layer w0.254: v1(102.489,50.172) 97.79,54.871 97.79,92.024 v1(102.133,96.368) 104.318,98.552 105.334,98.552 112.776,91.11 112.776,89.632 116.683,85.725 126.069,85.725 129.112,88.768 132.697,88.768 132.697,89.662 132.335,90.024 ADS1256.16 ; DBG5.13 182.753,144.145 182.753,101.346 186.094,98.005 186.944,98.005 187.667,97.282 187.667,90.385 SPI.1 191.16,83.414 191.16,49.708 v1(190.348,48.895) 189.992,19.678 CAN.1
  Bottom Layer w0.254: 78.486,96.393 77.267,95.174 77.267,92.964 77.597,92.634 79.045,92.634 82.779,96.368 v1(102.133,96.368) ; 102.489,45.085 v1(102.489,50.172) 103.766,48.895 v1(190.348,48.895)
NetADS1256_14: "Teensy 4.1.24" ADS1256.14 DBG3.7 | length 115.8
  Top Layer w0.254: v1(116.332,98.385) 116.332,92.266 ; DBG3.7 120.32,144.831 120.32,121.539 116.078,117.297 116.078,102.489 114.3,100.711 114.3,92.266 114.895,91.67 115.737,91.67 116.332,92.266 ; ADS1256.14 122.618,87.376 118.584,87.376 116.332,89.628 116.332,92.266
  Bottom Layer w0.254: 78.486,98.933 115.784,98.933 v1(116.332,98.385)
NetADS1256_15: "Teensy 4.1.23" ADS1256.15 DBG3.5 | length 185.9
  Top Layer w0.254: 63.246,68.453 73,78.207 73,80.547 71.501,82.046 71.501,83.308 73.156,84.963 81.331,84.963 93.878,97.511 93.878,137.897 102.743,146.761 114.3,146.761 114.935,146.126 114.935,145.161 115.265,144.831 116.84,144.831 117.17,145.161 117.17,146.304 118.567,147.701 121.92,147.701 DBG3.5 125.4,144.221 125.4,123.507 126.924,121.983 126.924,92.862 130.412,89.374 ADS1256.15
NetADS1256_20: "Teensy 4.1.10" ADS1256.20 DBG1.19 | length 180.5
  Top Layer w0.254: 78.486,88.773 77.267,89.992 77.267,112.268 77.902,112.903 80.366,112.903 82.551,115.088 v1(82.551,147.041) ; ADS1256.20 136.357,92.624 v1(136.779,92.202)
  Bottom Layer w0.254: DBG1.19 34.519,147.041 v1(82.551,147.041) ; 78.486,88.773 82.372,92.659 111.939,92.659 114.53,95.25 133.731,95.25 v1(136.779,92.202)
NetADS1256_21: "Teensy 4.1.22" ADS1256.21 DBG3.3 | length 150
  Top Layer w0.254: 63.246,70.993 65.049,70.993 71.12,77.064 71.12,80.935 70.993,81.062 70.993,83.519 75.921,88.446 v1(75.921,97.663) ; DBG3.3 127.635,144.526 127.635,95.984 130.048,93.571 ; v1(130.048,99.568) 130.048,93.571 ; ADS1256.21 130.345,93.274 130.048,93.571
  Bottom Layer w0.254: v1(75.921,97.663) 80.442,97.663 81.102,98.323 114.402,98.323 115.367,97.358 127.838,97.358 v1(130.048,99.568)
NetADS1256_22: "Teensy 4.1.12" ADS1256.22 DBG2.3 | length 130.1
  Top Layer w0.254: 78.486,93.853 87.884,103.251 87.884,144.145 DBG2.3 ; ADS1256.22 137.16,93.924 138.354,95.118 138.354,97.663 v1(136.093,99.924)
  Bottom Layer w0.254: 78.486,93.853 82.423,97.79 114.198,97.79 115.189,96.799 132.969,96.799 v1(136.093,99.924)
NetADS1256_23: "Teensy 4.1.11" ADS1256.23 DBG2.1 | length 124.5
  Top Layer w0.254: 78.486,91.313 90.221,103.048 90.221,143.942 DBG2.1 ; ADS1256.23 135.681,94.574 v1(136.23,95.123)
  Bottom Layer w0.254: 78.486,91.313 82.472,95.299 106.849,95.299 107.308,95.758 135.595,95.758 v1(136.23,95.123)
NetADS1256_24: "Teensy 4.1.13" ADS1256.24 DBG2.5 | length 127
  Top Layer w0.254: v1(83.287,100.203) 85.571,102.487 85.571,144.372 DBG2.5 ; ADS1256.24 132.298,95.224 132.817,95.743 v1(132.817,100.098)
  Bottom Layer w0.254: 63.246,93.853 64.253,93.853 70.603,100.203 v1(83.287,100.203) 101.093,100.203 101.728,99.568 119.086,99.568 120.61,101.092 128.274,101.092 129.417,102.235 130.679,102.235 v1(132.817,100.098)
"NetAnalog VREF Generator_2": "Analog VREF Generator.2" "Battery Hookup.1" "Step Down Circuit.1" DBG5.19 | length 143.2
  Top Layer w0.254: 101.6,74.308 101.6,75.463 102.616,76.479 103.632,76.479 105.283,78.13 105.283,91.38 ; v1(115.316,92.686) 115.316,98.85 116.586,100.12 116.586,116.561 123.038,123.012 124.765,123.012 125.285,122.492 125.285,119.499 124.079,118.293 ; v1(172.161,138.76) 172.161,143.713 DBG5.19
  Bottom Layer w0.254: 105.283,91.38 114.01,91.38 v1(115.316,92.686) ; 124.079,118.293 128.036,122.25 170.688,122.25 172.161,123.723 v1(172.161,138.76)
NetC0?_2: C0?.2 R0?.2 | length 9.4
  Top Layer w0.254: R0?.2 166.878,112.243 166.95,112.315 C0?.2
NetC1?_2: C1?.2 R1?.2 | length 9.3
  Top Layer w0.254: R1?.2 170.307,90.17 C1?.2
NetC2?_2: C2?.2 R2?.2 | length 9.1
  Top Layer w0.254: R2?.2 155.575,62.103 155.611,62.139 C2?.2
NetC3?_2: C3?.2 R3?.2 | length 9.2
  Top Layer w0.254: C3?.2 170.73,61.518 170.881,61.366 R3?.2
NetC4?_2: C4?.2 R4?.2 | length 9.5
  Top Layer w0.254: C4?.2 151.456,112.755 151.511,112.7 R4?.2
NetC5?_2: C5?.2 R5?.2 | length 9.6
  Top Layer w0.254: C5?.2 153.996,85.272 154.051,85.217 R5?.2
NetC6?_2: C6?.2 R6?.2 | length 9.7
  Top Layer w0.254: C6?.2 136.216,68.813 136.271,68.758 R6?.2
NetC7?_2: C7?.2 R7?.2 | length 9.5
  Top Layer w0.254: R7?.2 C7?.2
NetCAN_2: "Teensy 4.1.30" CAN.2 DBG3.19 | length 258.7
  Top Layer w0.254: v1(96.469,114.173) 96.469,138.913 103.353,145.796 DBG3.19 ; v1(170.028,146.025) 170.409,146.025 171.145,145.288 171.145,96.19 173.304,94.031 176.784,94.031 177.902,92.913 177.902,83.972 171.145,77.216 171.145,67.691 172.212,66.624 172.212,51.74 186.207,37.744 186.207,26.659 184.226,24.678 CAN.2
  Bottom Layer w0.254: 78.486,114.173 v1(96.469,114.173) ; DBG3.19 106.705,145.796 106.959,146.05 106.959,146.507 108.102,147.65 168.402,147.65 v1(170.028,146.025)
NetCAN_3: "Teensy 4.1.31" CAN.3 DBG4.1 | length 257.9
  Top Layer w0.254: DBG4.1 168.402,141.097 ; v1(168.935,124.409) 168.935,140.564 168.402,141.097 ; CAN.3 185.42,29.678 185.699,29.957 185.699,35.763 175.209,46.253 168.935,46.253 158.42,56.769 154.381,56.769 152.629,58.522 152.629,67.767 166.218,81.356 166.218,98.704 168.402,100.889 168.402,141.097
  Bottom Layer w0.254: 78.486,116.713 85.827,116.713 93.523,124.409 v1(168.935,124.409)
NetDBG1_1: "Teensy 4.1.1" DBG1.1 SPI.5 | length 270.5
  Top Layer w0.254: v1(39.624,78.765) 39.624,86.635 36.322,89.937 36.322,114.061 39.548,117.287 39.548,146.355 40.284,147.091 54.077,147.091 DBG1.1
  Bottom Layer w0.254: v1(39.624,78.765) 44.221,78.765 50.698,72.288 68.504,72.288 72.288,68.504 75.895,68.504 78.486,65.913 88.758,76.185 98.095,76.185 98.969,75.311 169.956,75.311 170.619,74.648 173.15,74.648 181.062,82.561 181.062,98.044 181.355,98.337 186.944,98.337 187.667,99.06 187.667,102.147 SPI.5
NetDBG1_3: "Teensy 4.1.2" DBG1.3 | length 142.8
  Top Layer w0.254: DBG1.3 54.483,144.145 54.483,129.819 57.607,126.695 57.607,102.438 59.792,100.254 63.805,100.254 64.46,99.599 64.46,98.044 64.129,97.714 62.23,97.714 59.131,94.615 59.131,48.768 60.401,47.498 68.25,47.498 79.705,58.953 79.705,67.234 78.486,68.453
NetDBG1_5: "Teensy 4.1.3" DBG1.5 | length 182.5
  Top Layer w0.254: v1(40.64,140.081) 40.64,117.661 36.83,113.851 36.83,94.956 40.64,91.146 40.64,39.548 41.402,38.786 63.475,38.786 80.213,55.524 80.213,69.266 78.486,70.993
  Bottom Layer w0.254: v1(40.64,140.081) 39.548,141.173 39.548,143.561 40.132,144.145 49.403,144.145 DBG1.5
NetDBG1_7: "Teensy 4.1.4" DBG1.7 | length 99.8
  Top Layer w0.254: DBG1.7 47.168,144.45 47.168,134.544 52.73,128.981 v1(52.73,80.188)
  Bottom Layer w0.254: v1(52.73,80.188) 51.308,78.765 51.308,77.953 54.407,74.854 67.767,74.854 69.088,73.533 78.486,73.533
NetDBG1_9: "Teensy 4.1.5" DBG1.9 | length 97.7
  Top Layer w0.254: DBG1.9 44.628,144.45 44.628,134.544 51.689,127.483 51.689,79.146 v1(52.426,78.41)
  Bottom Layer w0.254: v1(52.426,78.41) 53.442,77.394 64.465,77.394 65.786,76.073 78.486,76.073
NetDBG1_11: "Teensy 4.1.6" DBG1.11 | length 92
  Top Layer w0.254: DBG1.11 44.018,146.38 48.819,146.38 49.403,145.796 49.403,133.883 57.099,126.187 v1(57.099,90.119) ; v1(73.025,82.677) 74.422,82.677 78.486,78.613
  Bottom Layer w0.254: v1(57.099,90.119) 57.125,90.094 65.608,90.094 v1(73.025,82.677)
NetDBG1_13: "Teensy 4.1.7" DBG1.13 UART.2 | length 219.1
  Top Layer w0.254: v1(37.846,95.377) 41.656,99.187 41.656,144.272 DBG1.13 ; 78.486,81.153 84.023,75.616 84.023,43.764 102.601,25.186 UART.2
  Bottom Layer w0.254: v1(37.846,95.377) 41.554,91.669 61.163,91.669 62.078,92.583 67.056,92.583 78.486,81.153
NetDBG1_15: "Teensy 4.1.8" DBG1.15 UART.3 | length 279.6
  Top Layer w0.254: DBG1.15 37.008,144.45 37.008,140.183 38.859,138.331 38.859,117.317 35.814,114.271 35.814,83.388 v1(38.354,80.848) ; v1(132.563,80.213) 132.563,58.826 139.446,51.943 139.446,45.578 154.838,30.186 UART.3
  Bottom Layer w0.254: v1(38.354,80.848) 38.927,81.422 54.672,81.422 56.159,79.934 132.283,79.934 v1(132.563,80.213) 81.966,80.213 78.486,83.693
NetDBG1_17: "Teensy 4.1.9" DBG1.17 | length 136.2
  Top Layer w0.254: 78.486,86.233 92.659,100.406 v1(92.659,147.803)
  Bottom Layer w0.254: DBG1.17 34.417,144.399 32.512,144.399 31.928,144.983 31.928,147.599 33.528,149.2 91.262,149.2 v1(92.659,147.803)
NetDBG2_15: "Teensy 4.1.18" DBG2.15 I2C.2 | length 260.4
  Top Layer w0.254: v1(67.107,82.296) 67.107,107.772 69.799,110.465 69.799,145.288 70.891,146.38 72.949,146.38 DBG2.15 ; v1(179.832,63.5) 179.887,63.5 183.109,60.278 I2C.2
  Bottom Layer w0.254: v1(67.107,82.296) 65.964,81.153 63.246,81.153 55.728,81.153 54.864,82.017 38.075,82.017 36.83,80.772 36.83,79.491 40.401,75.921 46.076,75.921 52.273,69.723 64.922,69.723 69.393,65.253 74.854,65.253 78.003,62.103 106.324,62.103 109.449,65.227 142.672,65.227 144.399,63.5 v1(179.832,63.5)
NetDBG2_17: "Teensy 4.1.19" DBG2.17 I2C.3 | length 236.4
  Top Layer w0.254: v1(69.596,78.613) 69.596,86.538 72.187,89.129 72.187,125.527 79.959,133.299 79.959,146.304 79.68,146.583 76.2,146.583 75.184,145.567 75.184,144.78 74.87,144.466 72.323,144.466 DBG2.17 ; v1(172.161,76.175) 172.161,69.399 172.72,68.841 172.72,63.043 181.864,53.899 186.944,53.899 187.401,54.356 187.401,62.535 I2C.3
  Bottom Layer w0.254: 63.246,78.613 v1(69.596,78.613) 76.403,78.613 77.724,77.292 171.044,77.292 v1(172.161,76.175)
NetDBG3_11: "Teensy 4.1.26" DBG3.11 SPI.6 | length 178.1
  Top Layer w0.254: 78.486,104.013 85.039,110.566 85.039,145.288 88.671,148.92 113.081,148.92 DBG3.11 116.205,147.727 116.687,148.209 140.157,148.209 142.037,146.329 142.037,128.981 157.582,113.436 v1(157.582,112.395)
  Bottom Layer w0.254: v1(157.582,112.395) 158.532,113.345 180.279,113.345 SPI.6
NetDBG3_13: "Teensy 4.1.27" DBG3.13 SPI.4 | length 158.7
  Top Layer w0.254: v1(111.252,108.229) 114.63,111.608 114.63,144.69 DBG3.13
  Bottom Layer w0.254: 78.486,106.553 109.728,106.553 111.252,105.029 111.252,104.343 112.776,102.819 116.662,102.819 ; v1(111.252,108.229) 116.662,102.819 ; SPI.4 182.232,103.772 152.429,103.772 151.934,104.267 129.293,104.267 127.846,102.819 116.662,102.819
NetDBG3_15: "Teensy 4.1.28" DBG3.15 | length 65.4
  Top Layer w0.254: v1(104.47,109.093) 110.16,114.783 110.16,144.831 DBG3.15
  Bottom Layer w0.254: 78.486,109.093 v1(104.47,109.093)
NetDBG3_17: "Teensy 4.1.29" DBG3.17 | length 59.6
  Top Layer w0.254: v1(100.127,112.522) 109.55,121.945 109.55,144.831 DBG3.17
  Bottom Layer w0.254: 78.486,111.633 99.238,111.633 v1(100.127,112.522)
NetDBG4_3: "Teensy 4.1.32" DBG4.3 | length 100
  Top Layer w0.254: v1(156.413,130.607) 159.817,134.01 159.817,145.212 DBG4.3
  Bottom Layer w0.254: 78.486,119.253 89.84,130.607 v1(156.413,130.607)
NetDBG4_5: "Teensy 4.1.33" DBG4.5 SPI.10 | length 198.8
  Top Layer w0.254: 63.246,119.253 64.46,118.039 64.46,116.21 63.749,115.499 62.326,115.499 61.519,116.307 61.519,149.25 66.751,154.483 149.936,154.483 DBG4.5 160.782,148.717 186.131,148.717 188.02,146.829 188.02,125.028 SPI.10
NetDBG4_7: "Teensy 4.1.34" DBG4.7 | length 128
  Top Layer w0.254: 63.246,116.713 62.027,117.932 62.027,148.336 63.627,149.936 151.943,149.936 DBG4.7
NetDBG4_9: "Teensy 4.1.35" DBG4.9 | length 125.5
  Top Layer w0.254: 63.246,114.173 64.968,115.895 v1(64.968,148.158) ; v1(150.622,148.717) DBG4.9
  Bottom Layer w0.254: v1(64.968,148.158) 88.722,148.158 90.297,146.583 97.815,146.583 99.949,148.717 v1(150.622,148.717)
NetDBG4_11: "Teensy 4.1.36" DBG4.11 SPI.8 | length 258.8
  Top Layer w0.254: v1(58.115,154.508) 58.115,116.764 63.246,111.633
  Bottom Layer w0.254: v1(58.115,154.508) 180.264,154.508 ; DBG4.11 151.79,145.009 170.764,145.009 180.264,154.508 ; SPI.8 198.628,128.016 198.628,145.669 189.789,154.508 180.264,154.508
NetDBG4_13: "Teensy 4.1.37" DBG4.13 SPI.9 | length 189.4
  Top Layer w0.254: DBG4.13 149.098,145.161 158.572,145.161 159.207,145.796 159.207,145.974 160.858,147.625 185.801,147.625 187.512,145.914 187.512,126.475 184.697,123.661 184.697,120.357 SPI.9
  Bottom Layer w0.254: 63.246,109.093 62.027,110.312 62.027,135.294 67.83,141.097 84.48,141.097 85.649,142.265 85.649,143.256 86.233,143.84 93.027,143.84 94.755,142.113 130.454,142.113 133.062,144.72 146.625,144.72 DBG4.13
NetDBG4_15: "Teensy 4.1.38" DBG4.15 | length 125.3
  Top Layer w0.254: 63.246,106.553 62.027,107.772 62.027,109.728 62.713,110.414 64.135,110.414 65.476,111.754 65.476,146.375 68.529,149.428 142.291,149.428 DBG4.15
NetDBG4_17: "Teensy 4.1.39" DBG4.17 | length 129.9
  Bottom Layer w0.254: 63.246,104.013 64.465,105.232 64.465,135.128 65.862,136.525 89.078,136.525 94.158,141.605 147.676,141.605 149.047,142.977 149.047,146.812 148.734,147.126 143.951,147.126 DBG4.17
NetDBG4_19: "Teensy 4.1.40" DBG4.19 | length 114.5
  Top Layer w0.254: v1(138.887,115.595) 138.887,144.602 DBG4.19
  Bottom Layer w0.254: 63.246,101.473 64.11,101.473 66.396,103.759 71.12,103.759 72.136,104.775 72.136,107.721 77.267,112.852 98.429,112.852 100.182,114.605 137.897,114.605 v1(138.887,115.595)
NetDBG5_3: "Teensy 4.1.46" DBG5.3 | length 158.1
  Bottom Layer w0.254: 68.326,106.553 68.326,134.112 69.342,135.128 96.088,135.128 100.66,139.7 167.715,139.7 172.465,144.45 193.218,144.45 DBG5.3
NetDBG5_5: "Teensy 4.1.47" DBG5.5 | length 154
  Bottom Layer w0.254: 65.786,106.553 67.132,105.207 69.088,105.207 69.596,105.715 69.596,110.261 77.267,117.932 84.721,117.932 93.383,126.594 156.082,126.594 173.329,143.84 194.056,143.84 195.148,144.932 195.148,145.796 194.564,146.38 192.608,146.38 DBG5.5
NetDBG5_7: "Teensy 4.1.50" DBG5.7 | length 179.7
  Top Layer w0.254: 75.436,72.263 74.219,73.48 74.219,80.658 73.216,81.661 72.604,81.661 72.009,82.256 72.009,83.098 72.604,83.693 74.714,83.693 75.984,82.423 79.604,82.423 98.908,101.727 v1(98.908,139.827)
  Bottom Layer w0.254: v1(98.908,139.827) 100.152,141.072 167.615,141.072 172.923,146.38 188.138,146.38 DBG5.7
NetDBG5_9: "Teensy 4.1.51" DBG5.9 | length 187.4
  Top Layer w0.254: v1(180.035,88.38) 187.159,95.504 187.159,97.028 186.69,97.497 185.883,97.497 180.518,102.863 180.518,145.796 181.254,146.533 185.445,146.533 DBG5.9
  Bottom Layer w0.254: 75.436,69.723 81.559,69.723 88.544,76.708 98.984,76.708 99.39,76.302 170.053,76.302 171.196,75.159 172.644,75.159 180.035,82.55 v1(180.035,88.38)
NetDBG5_11: "Teensy 4.1.57" DBG5.11 SPI.7 | length 188.2
  Top Layer w0.254: DBG5.11 184.988,144.45 184.988,126.051 184.189,125.252 184.189,113.245 SPI.7
  Bottom Layer w0.254: 78.486,63.373 103.429,63.373 106.528,66.472 142.951,66.472 145.255,64.168 175.623,64.168 188.175,76.72 188.175,109.259 SPI.7
NetDBG5_15: "RTC power batt.2" "Teensy 4.1.43" DBG5.15 | length 228.2
  Top Layer w0.254: v1(100.813,102.794) 95.047,97.028 95.047,45.661 107.315,33.393 ; v1(172.796,101.625) 172.796,137.361 174.828,139.393 174.828,145.288 175.946,146.406 177.952,146.406 DBG5.15
  Bottom Layer w0.254: 75.946,106.553 75.946,103.556 76.708,102.794 v1(100.813,102.794) 110.559,102.794 111.042,102.311 128.056,102.311 128.996,103.251 148.006,103.251 148.514,103.759 149.784,103.759 151.917,101.625 v1(172.796,101.625)
pads on no net: "ADC Clock Generator.1" "Analog VREF Generator.1" "Analog VREF Generator.3" "Analog VREF Generator.5" "Analog VREF Generator.7" "Analog VREF Generator.8" "Teensy 4.1.44" "Teensy 4.1.53" "Teensy 4.1.68" ADS1256.18 ADS1256.25 ADS1256.26 ADS1256.27 ADS1256.28 CAN.M1 CAN.M2 DBG1.2 DBG1.4 DBG1.6 DBG1.8 DBG1.10 DBG1.12 DBG1.14 DBG1.16 DBG1.18 DBG1.20 DBG2.2 DBG2.4 DBG2.6 DBG2.8 DBG2.10 DBG2.12 DBG2.14 DBG2.16 DBG2.18 DBG2.20 DBG3.2 DBG3.4 DBG3.6 DBG3.8 DBG3.10 DBG3.12 DBG3.14 DBG3.16 DBG3.18 DBG3.20 DBG4.2 DBG4.4 DBG4.6 DBG4.8 DBG4.10 DBG4.12 DBG4.14 DBG4.16 DBG4.18 DBG4.20 DBG5.2 DBG5.4 DBG5.6 DBG5.8 DBG5.10 DBG5.12 DBG5.14 DBG5.16 DBG5.18 DBG5.20 DBG6.2 DBG6.4 DBG6.6 DBG6.8 DBG6.10 DBG6.12 DBG6.14 DBG6.16 DBG6.18 DBG6.20 I2C.M1 I2C.M2 SPI.11 SPI.12 SPI.13 SPI.14 SPI.15 SPI.16 SPI.17 SPI.18 SPI.19 SPI.20 UART.M1 UART.M2
copper on no net: | length 9.9
  Top Layer w0.254: v2@14.859,145.288 v2@16.383,145.288 ; v2@18.288,147.955 v2@19.05,147.955 ; v2@210.058,144.907 210.058,141.224 v2@212.852,138.43
  other v2: 14.478,13.462 212.598,14.351 16.891,144.526 213.106,144.653

## Other copper
Top Layer:
  text "Analog" at 159.385,128.905 h1.52
  text "Digital" at 29.337,125.603 h1.52
Bottom Layer:
  text "Designed by Andrew & Kyle" at 210.439,129.159 h2.03 r270
  text "Georgia Tech" at 33.147,12.065 h1.91
  text "OFF ROAD" at 32.766,6.35 h3.05
  text "Hello :)" at 122.047,3.048 h0.51